# Altium PCB Mako DSP R1.2.PcbDoc (part 1 of 2)
Units mil, origin at the board's own origin, x right, y up, seen from the top; angles counter-clockwise.
Board outline 4500 x 2100 mil, 4 copper layers (Top Layer, GND, Power, Bottom Layer); 169 components, 129 nets, 625 pads, 177 vias.
Unrouted connection lines stored in the file: 86.
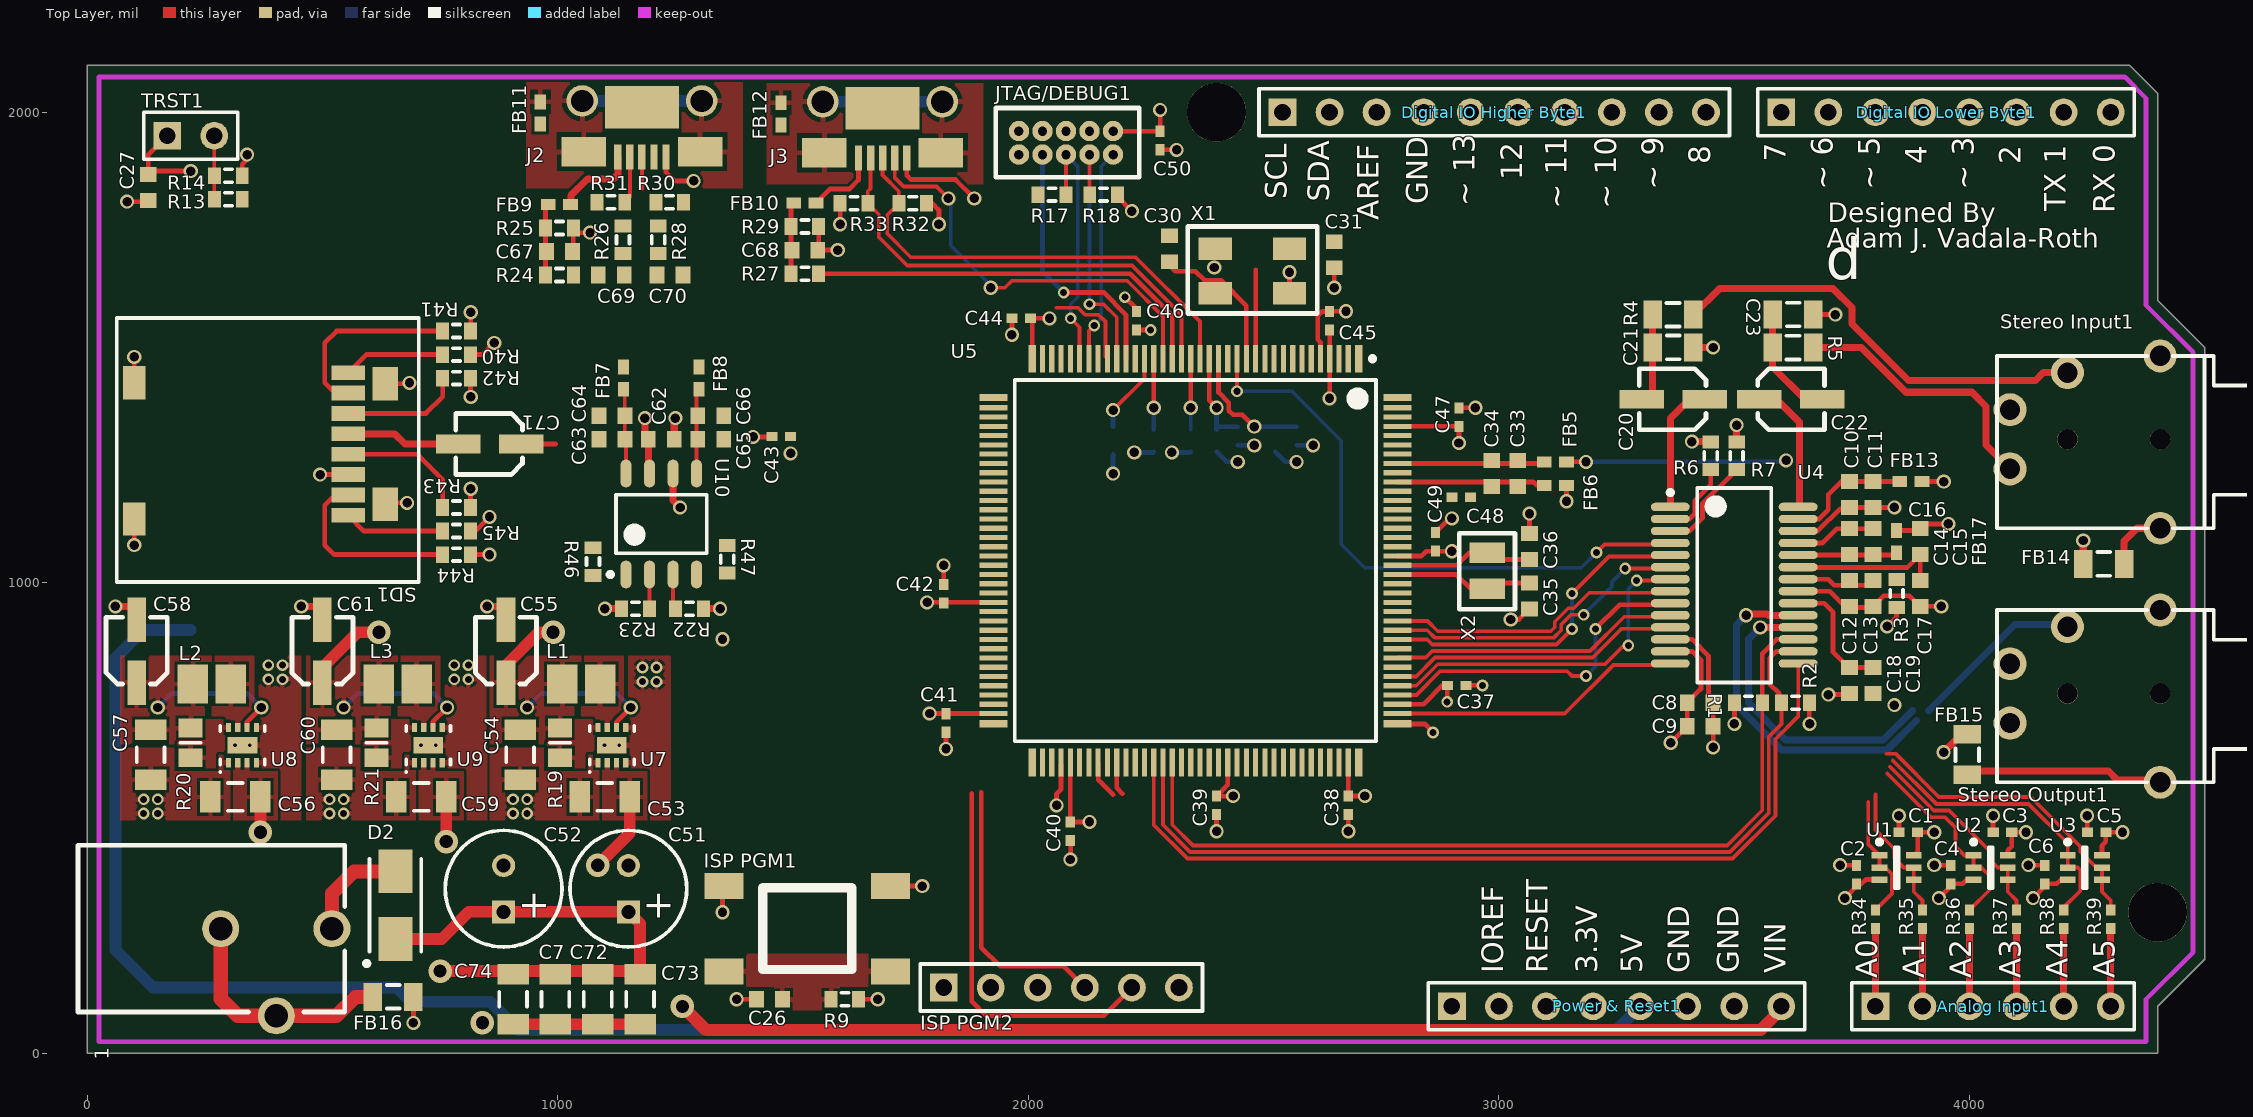
[diagram p0: Top Layer view]
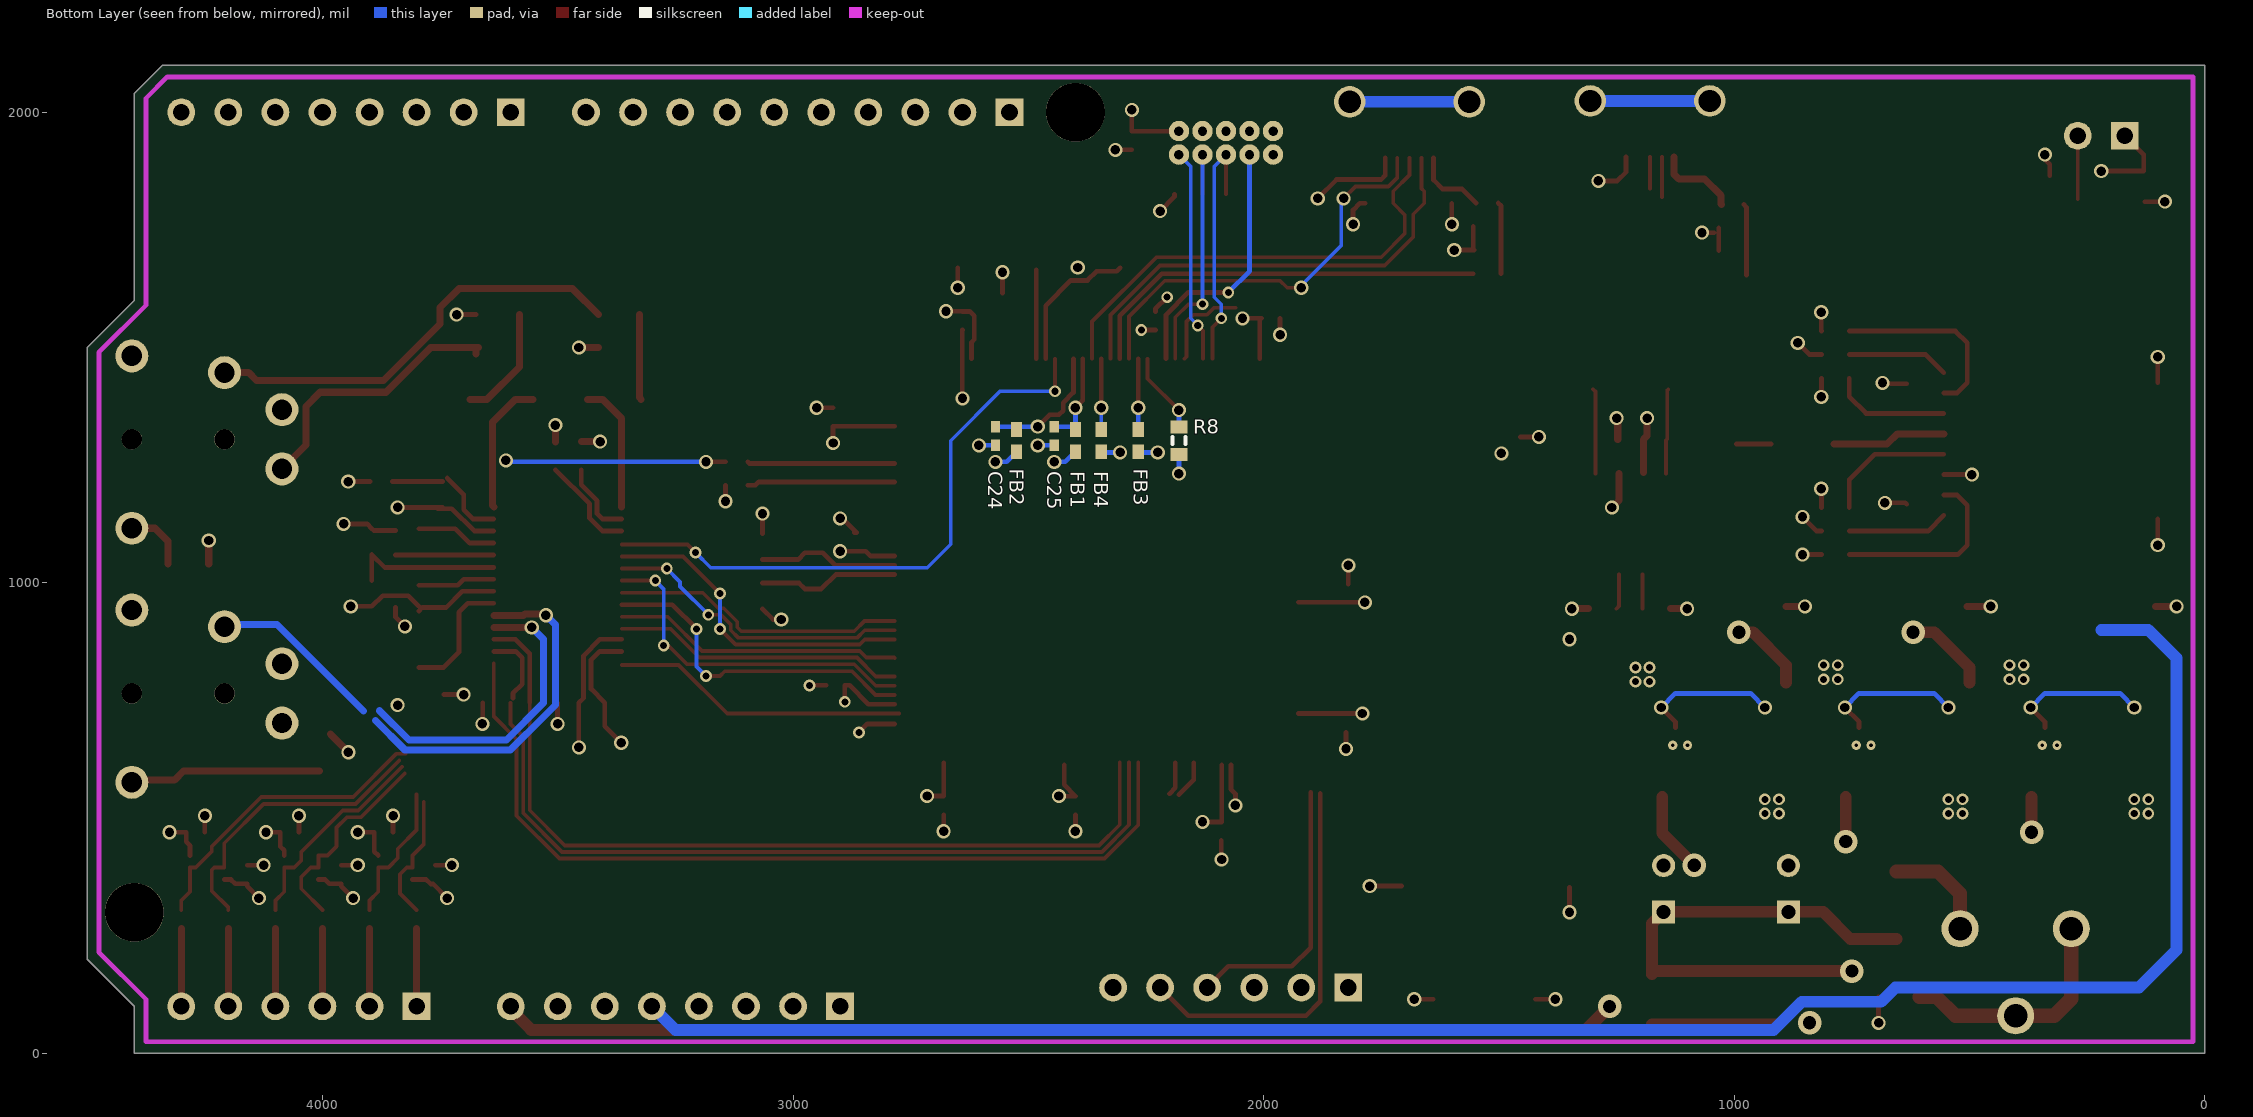
[diagram p1: Bottom Layer view, seen from below]
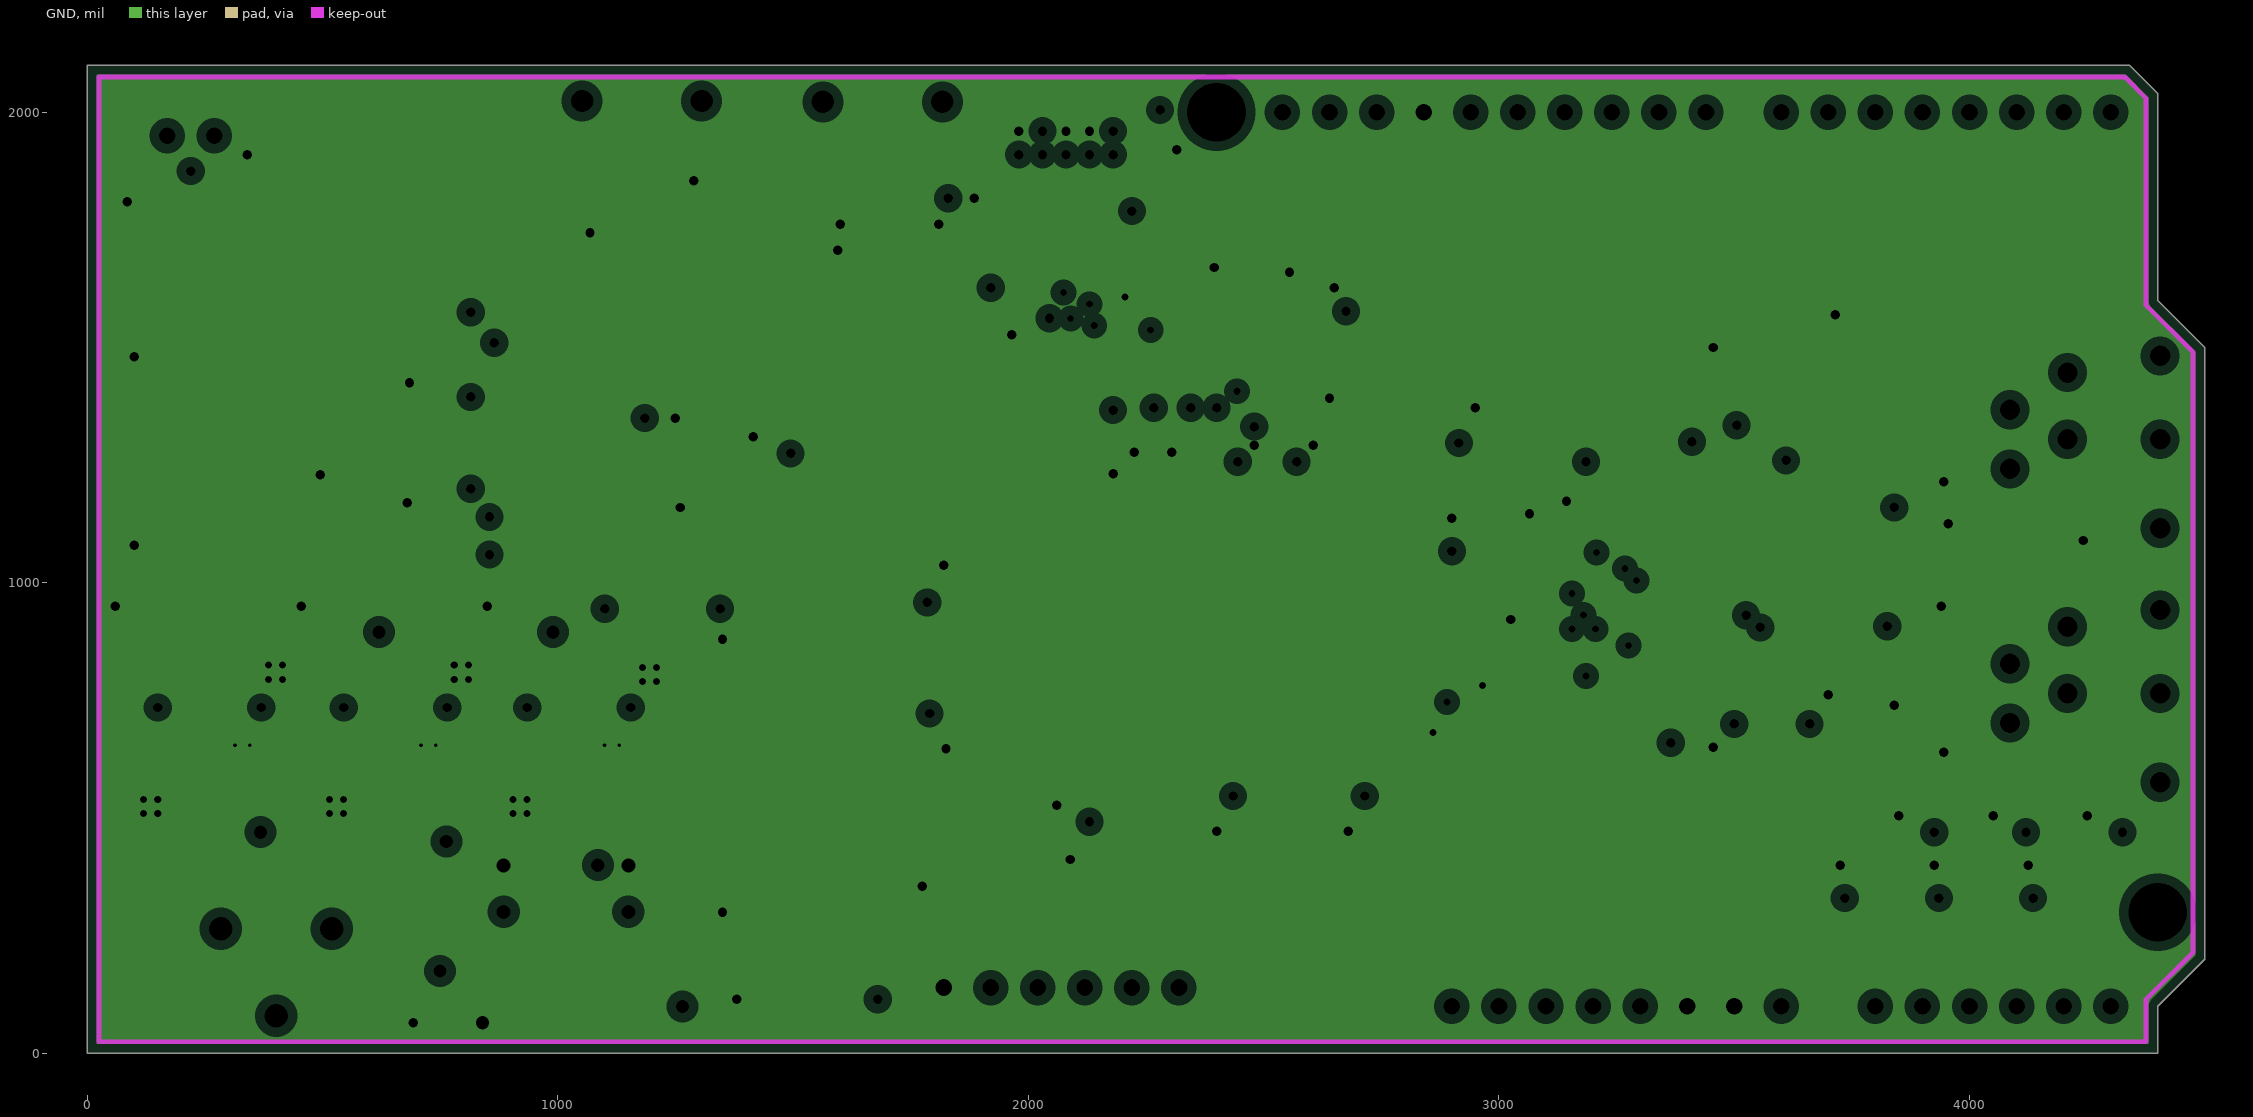
[diagram p2: GND, clearances drawn from the general rule]
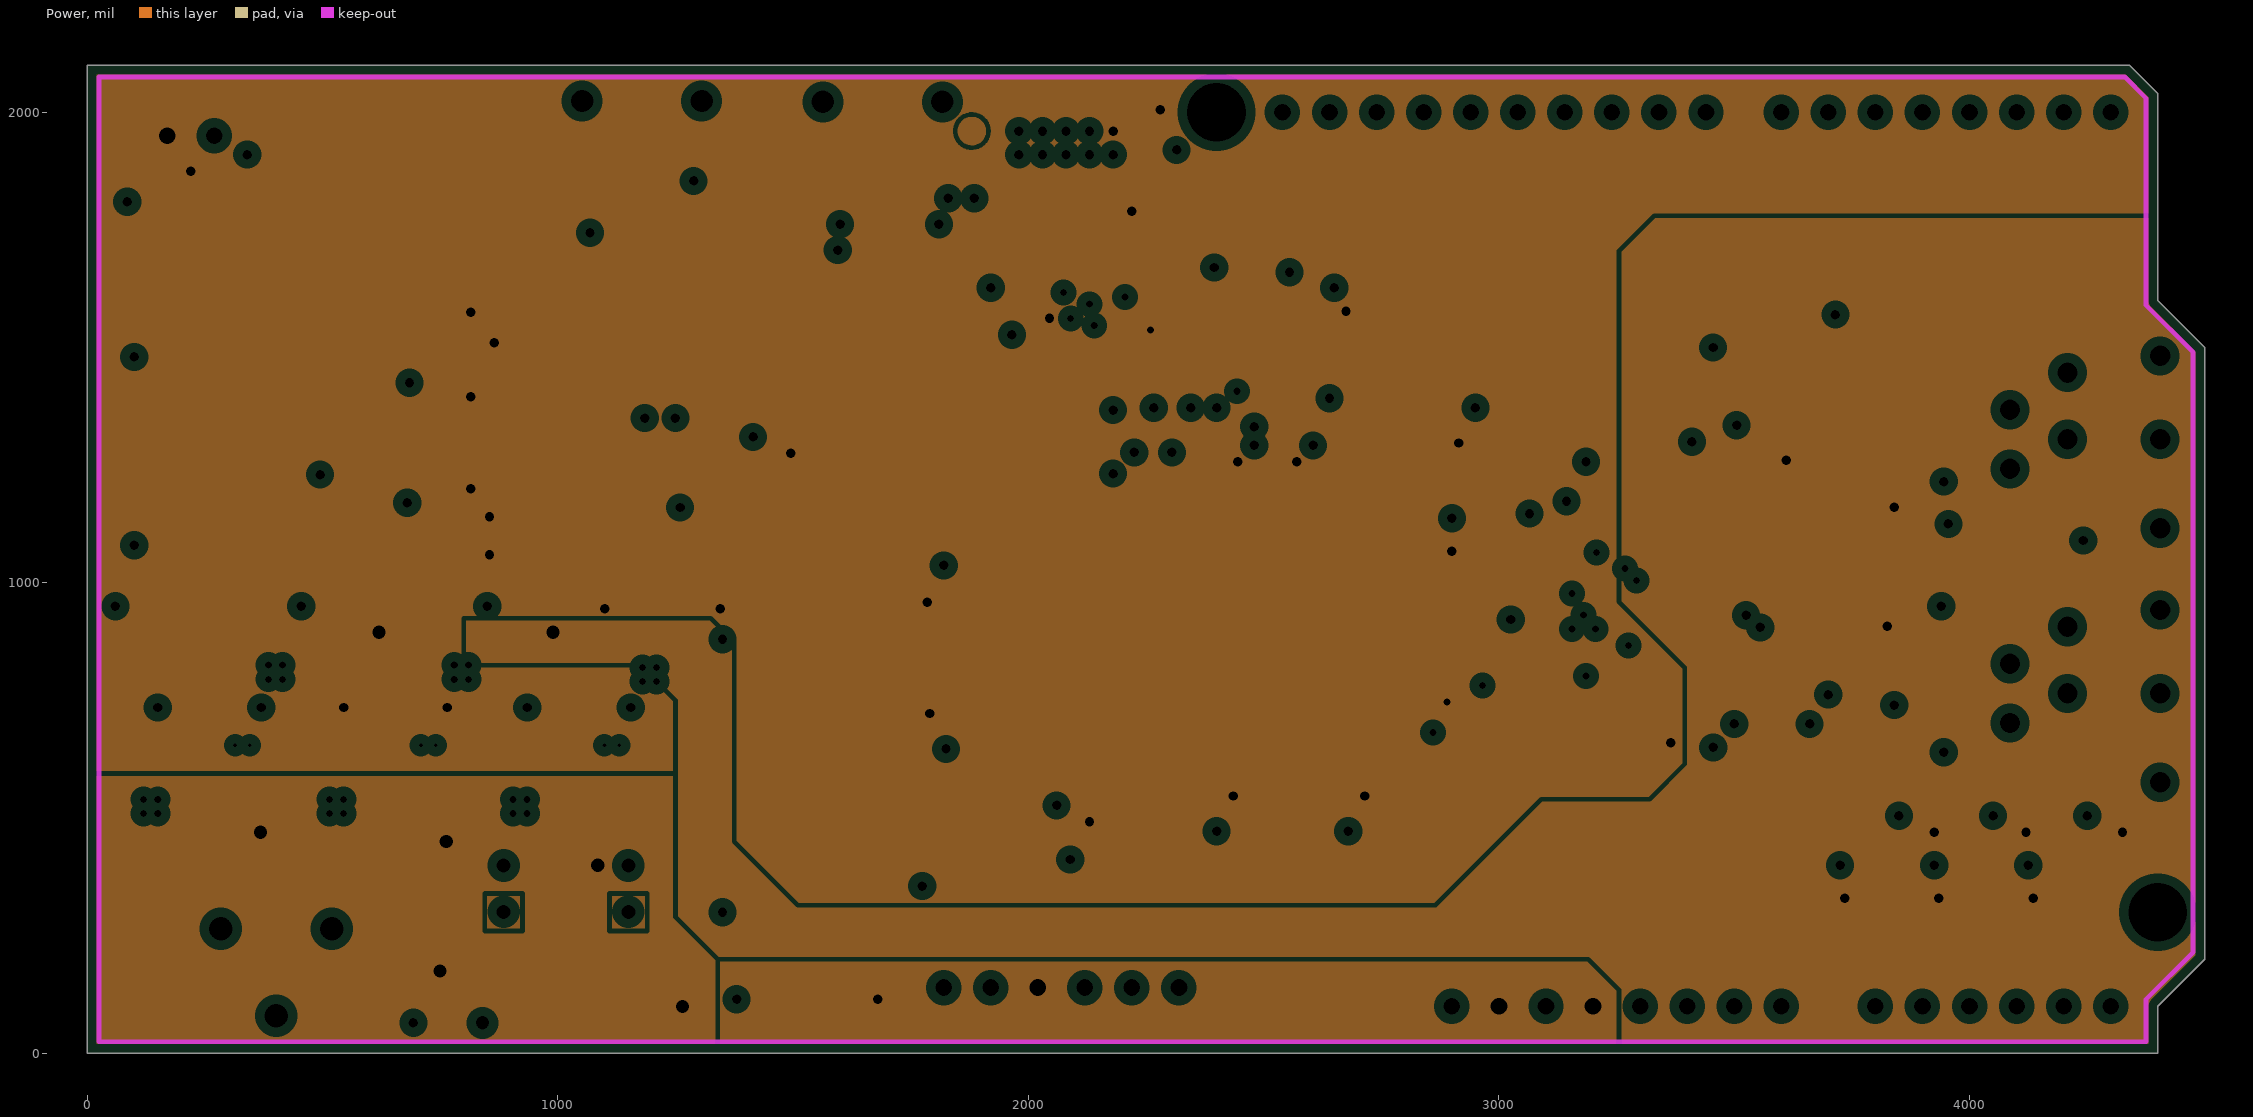
[diagram p3: Power, clearances drawn from the general rule]

## Layer stack, top to bottom
Top Layer: signal copper 1.4
Dielectric: core 12.6, FR-4, Dk 4.8
GND: plane copper 1.4, net GND
Dielectric: prepreg 12.6, FR-4, Dk 4.8
Power: plane copper 1.4, net (Multiple Nets)
Dielectric: core 12.6, FR-4, Dk 4.8
Bottom Layer: signal copper 1.4

## Board outline
0,0 0,2100 4340,2100 4400,2040 4400,1600 4500,1500 4500,200 4400,100 4400,0

## Design rules (kind name [scope] priority, off if disabled: settings)
Clearance [All] p1: gap=6
ComponentClearance [All] p1: gap=0 collisioncheckmode=3 verticalgap=10 showdistances=FALSE
DiffPairsRouting [All] p1: maxlimit=10 minlimit=10 mostfreqgap=10 maxuncoupledlength=500
FanoutControl Fanout_SOIC [(InComponent('U8') AND InComponent('U7'))] p3: bgadir=Out bgaviamode=Centered fanoutstyle=Staggered fanoutdirection=Alternating viagrid=1 // Fanout_SOIC (Default Rule)
FanoutControl Fanout_Small [All] p4: bgadir=Out bgaviamode=Centered fanoutstyle=Auto fanoutdirection=Alternating viagrid=1 // Fanout_Small (Default Rule)
HoleSize [All] p1: absolutevalues=TRUE maxlimit=120 minlimit=1 maxpercent=80.000 minpercent=20.000
MinimumSolderMaskSliver [All] p1 off: minsoldermaskwidth=10
PlaneClearance [All] p1: clearance=20
PlaneConnect [All] p1: planeconnectstyle=Direct reliefexpansion=20 reliefentries=4 reliefconductorwidth=10 reliefairgap=10
PolygonConnect [All] p1: connectstyle=Relief reliefconductorwidth=10 reliefentries=4 polygonreliefangle="90 Angle" airgapwidth=10
RoutingVias [All] p1: holewidth=15 width=25 viastyle="Through Hole" minholewidth=15 minwidth=25 maxholewidth=28 maxwidth=50
SilkToSilkClearance [All] p1 off: silktosilkclearance=10
SilkToSolderMaskClearance SilkscreenOverComponentPads [IsPad] p1 off: minsilkscreentomaskgap=10 clearancetoexposedcopper=TRUE
SolderMaskExpansion [All] p1: expansion=4
Width [All] p1: maxlimit=30 minlimit=6 preferedwidth=6 minimp=50.000000 maximp=50.000000 favimp=50.000000
18 further rules are at their usual default settings.

## Classes and differential pairs
component class "Mako DSP Power R1.1": 1 12VDC/VCCIN C7 C51 C52 C53 C54 C55 C56 C57 C58 C59 C60 C61 C72 C73 C74 D2 D? FB16 L1 L2 L3 L? R19 R20 R21 U7 U8 U9
component class "Mako DSP Arduio IO R1.1": "Analog Input1" "Analog Input?" C1 C2 C3 C4 C5 C6 "Digital IO Higher Byte1" "Digital IO Higher Byte?" "Digital IO Lower Byte1" "Digital IO Lower Byte?" "Power & Reset1" "Power & Reset?" R34 R35 R36 R37 R38 R39 SSP? U1 U2 U3
component class "Mako DSP Audio Codec R1.1": C8 C9 C10 C11 C12 C13 C14 C15 C16 C17 C18 C19 C20 C21 C22 C23 FB13 FB14 FB15 FB17 R1 R2 R3 R4 R5 R6 R7 "Stereo Input1" "Stereo Input?" "Stereo Output1" "Stereo Output?" U4
component class "Mako DSP Main R1.1": C24 C25 C26 C27 C28 C29 C30 C31 C32 C33 C34 C35 C36 C37 C38 C39 C40 C41 C42 C43 C44 C45 C46 C47 C48 C49 C50 C71 DBGEN1 FB1 FB2 FB3 FB4 FB5 FB6 "ISP PGM" "ISP PGM1" "ISP PGM2" JTAG/DEBUG1 R8 R9 R12 R13 R14 R15 R16 R17 R18 R40 R41 R42 R43 R44 R45 RESET RESET1 RTCALARM1 SD1 TRST1 U5 WAKEUP1 X1 X2
component class "Mako DSP USBR1.1": C62 C63 C64 C65 C66 C67 C68 C69 C70 FB7 FB8 FB9 FB10 FB11 FB12 J2 J3 R22 R23 R24 R25 R26 R27 R28 R29 R30 R31 R32 R33 R46 R47 U10
differential pair USB_1: +USB_1_P -USB_1_N
differential pair USB1: +USB1_P -USB1_N
differential pair USB0: +USB0_P -USB0_N

## Components (designator, comment, footprint, x,y, rotation, side; value= is the part's Value field where it differs from the comment)
1 "Center-positive 2.1 mm power jack" PJ-102AH 520,265 r90 top
"Analog Input1" "Arduino Leonardo Analog" "Arduino Leonardo Analog" 3800,100 r0 top locked
C1 "Cap Semi" 0402 3870,470 r0 top
C2 "Cap Semi" 0402 3760,380 r270 top
C3 "Cap Semi" 0402 4070,470 r0 top
C4 "Cap Semi" 0402 3960,380 r270 top
C5 "Cap Semi" 0402 4270,470 r0 top
C6 "Cap Semi" 0402 4160,380 r270 top
C7 "Cap Semi" C1206 995,115 r90 top
C8 "Cap Semi" 1608[0603] 3427.56,745.31 r180 top
C9 "Cap Semi" 1608[0603] 3427.56,695.31 r180 top
C10 "Cap Semi" 1608[0603] 3745,1187.56 r270 top
C11 "Cap Semi" 1608[0603] 3795,1187.56 r270 top
C12 "Cap Semi" 1608[0603] 3745,977.56 r90 top
C13 "Cap Semi" 1608[0603] 3795,977.56 r90 top
C14 "Cap Semi" 1608[0603] 3745,1087.56 r90 top
C15 "Cap Semi" 1608[0603] 3795,1087.56 r90 top
C16 "Cap Semi" 1608[0603] 3895,1087.56 r270 top
C17 "Cap Semi" 1608[0603] 3895,977.56 r90 top
C18 "Cap Semi" 1608[0603] 3745,792.56 r90 top
C19 "Cap Semi" 1608[0603] 3795,792.56 r90 top
C20 "Cap Semi" "Panasonic VS B" 3370,1390 r0 top
C21 "Cap Semi" "SM 0805 - gap trimmed" 3370,1500 r180 top
C22 "Cap Semi" "Panasonic VS B" 3620,1390 r180 top
C23 "Cap Semi" "SM 0805 - gap trimmed" 3625,1570 r180 top
C24 "Cap Semi" 0402 2570,1312.05 r90 bottom
C25 "Cap Semi" 0402 2445,1312.05 r90 bottom
C26 "Cap Semi" CAPC1608L 1450,115 r0 top
C27 "Cap Semi" CAPC1608L 130,1840 r90 top
C28 "Cap Semi" CAPC1608L 970,2590 r90 top
C29 "Cap Semi" CAPC1608L 3055,-505 r0 top
C30 "Cap Semi" 1608[0603] 2300,1710 r90 top
C31 "Cap Semi" 1608[0603] 2650,1697.05 r90 top
C32 "Cap Semi" CAPC1608L 5140,2480 r90 top
C33 "Cap Semi" 1608[0603] 3040,1232.05 r90 top
C34 "Cap Semi" 1608[0603] 2985,1232.05 r90 top
C35 "Cap Semi" 1608[0603] 3065,972.05 r90 top
C36 "Cap Semi" 1608[0603] 3065,1077.05 r270 top
C37 "Cap Semi" 0402 2910,782.05 r180 top
C38 "Cap Semi" 0402 2680,527.05 r90 top
C39 "Cap Semi" 0402 2400,527.05 r90 top
C40 "Cap Semi" 0402 2089.25,472.05 r90 top
C41 "Cap Semi" 0402 1825,702.05 r90 top
C42 "Cap Semi" 0402 1820,977.05 r270 top
C43 "Cap Semi" 0402 1475,1310.75 r0 top
C44 "Cap Semi" 0402 1985,1562.05 r0 top
C45 "Cap Semi" 0402 2640,1557.05 r90 top
C46 "Cap Semi" 0402 2230,1557.05 r270 top
C47 "Cap Semi" 0402 2915,1352.05 r270 top
C48 "Cap Semi" 0402 2920,1182.05 r180 top
C49 "Cap Semi" 0402 2865,1087.05 r270 top
C50 "Cap Semi" 0402 2280,1940 r90 top
C51 "Cap Pol1" CAPPR2.5-6.3x5 1150,350 r90 top
C52 "Cap Pol1" CAPPR2.5-6.3x5 885,350 r90 top
C53 "Cap Semi" C1206 1100,545 r0 top
C54 "Cap Semi" C1206 920,635 r90 top
C55 "Cap Semi" "Panasonic VS B" 890,855 r270 top
C56 "Cap Semi" C1206 315,545 r0 top
C57 "Cap Semi" C1206 135,635 r90 top
C58 "Cap Semi" "Panasonic VS B" 105,855 r270 top
C59 "Cap Semi" C1206 710,545 r0 top
C60 "Cap Semi" C1206 530,635 r90 top
C61 "Cap Semi" "Panasonic VS B" 500,855 r270 top
C62 "Cap Semi" 1608[0603] 1220,1305 r180 top
C63 "Cap Semi" 1608[0603] 1115,1305 r0 top
C64 "Cap Semi" 1608[0603] 1115,1355 r0 top
C65 "Cap Semi" 1608[0603] 1325,1305 r180 top
C66 "Cap Semi" 1608[0603] 1325,1355 r180 top
C67 "Cap Semi" 1608[0603] 1003.56,1704.04 r180 top
C68 "Cap Semi" 1608[0603] 1525,1707.05 r180 top
C69 "Cap Semi" 1608[0603] 1113.56,1654.04 r0 top
C70 "Cap Semi" 1608[0603] 1238.56,1654.04 r180 top
C71 "Cap Semi" "Panasonic VS B" 855,1295 r0 top
C72 "Cap Semi" C1206 1085,115 r90 top
C73 "Cap Semi" C1206 1175,115 r90 top
C74 "Cap Semi" C1206 905,115 r90 top
D2 "PMEG4050EP" PMEG4050EP 655,315 r90 top
DBGEN1 "Header 2" HDR1X2 1010,2700 r0 top
"Digital IO Higher Byte1" "Arduino Leonardo High Byte" "Arduino Leonardo High Byte" 2540,2000 r0 top
"Digital IO Lower Byte1" "Arduino Leonardo Low Byte" "Arduino Leonardo Low Byte" 3600,2000 r0 top locked
FB1 "BLM15HG601SN1D" BLM18PG121SN1D 2400,1302.05 r90 bottom
FB2 "BLM15HG601SN1D" BLM18PG121SN1D 2525,1302.05 r90 bottom
FB3 "BLM15HG601SN1D" BLM18PG121SN1D 2266.42,1302.05 r270 bottom
FB4 "BLM15HG601SN1D" BLM18PG121SN1D 2345,1302.05 r270 bottom
FB5 "BLM15HG601SN1D" BLM18PG121SN1D 3120,1257.05 r180 top
FB6 "BLM15HG601SN1D" BLM18PG121SN1D 3120,1207.05 r180 top
FB7 "BLM15HG601SN1D" BLM18PG121SN1D 1140,1435 r90 top
FB8 "BLM15HG601SN1D" BLM18PG121SN1D 1300,1435 r90 top
FB9 "BLM15HG601SN1D" BLM18PG121SN1D 1003.56,1804.04 r0 top
FB10 "BLM15HG601SN1D" BLM18PG121SN1D 1525,1807.05 r0 top
FB11 "BLM15HG601SN1D" BLM18PG121SN1D 962.83,1998.46 r270 top
FB12 "BLM15HG601SN1D" BLM18PG121SN1D 1474.28,1996.47 r270 top
FB13 "BLM15HG601SN1D" BLM18PG121SN1D 3875.16,1215.16 r0 top
FB14 "Ferrite" "SM 0805 - gap trimmed" 4285,1040 r180 top
FB15 "Ferrite" "SM 0805 - gap trimmed" 3995,635 r90 top
FB16 "Ferrite" "SM 0805 - gap trimmed" 650,120 r180 top
FB17 "BLM15HG601SN1D" BLM18PG121SN1D 3845,1087.56 r90 top
"ISP PGM1" "Tactile Switch" TL3301 1530,265 r90 top
"ISP PGM2" "Header 6" HDR1X6 1820,140 r0 top
J2 "DX4R005J91R5100" "Micro USB Circular Holes Only" 1177.83,2063.46 r180 top
J3 "DX4R005J91R5100" "Micro USB Circular Holes Only" 1689.28,2061.47 r180 top
JTAG/DEBUG1 "S9015E-05-ND" S9015E-05-ND 1980,1960 r0 top
L1 "Inductor" VLS252012T-2R2M1R3 1050,785 r180 top
L2 "Inductor" VLS252012T-2R2M1R3 265,785 r180 top
L3 "Inductor" VLS252012T-2R2M1R3 660,785 r180 top
"Power & Reset1" "Arduino Leonardo Power" "Arduino Leonardo Power" 2900,100 r0 top locked
R1 "Res3" J1-0603 3530.16,745.16 r180 top
R2 "Res3" J1-0603 3630.16,745.16 r0 top
R3 "Res3" J1-0603 3845,977.56 r270 top
R4 "Res3" "SM 0805 - gap trimmed" 3370,1570 r0 top
R5 "Res3" "SM 0805 - gap trimmed" 3625,1500 r0 top
R6 "Res3" J1-0603 3450,1270 r270 top
R7 "Res3" J1-0603 3505,1270 r270 top
R8 "Res3" J1-0603 2180,1302.05 r90 bottom
R9 "Res3" J1-0603 1610,115 r0 top
R12 "Res3" J1-0603 3215,-505 r0 top
R13 "Res3" J1-0603 300,1815 r180 top
R14 "Res3" J1-0603 300,1865 r180 top
R15 "Res3" J1-0603 1140,2565 r180 top
R16 "Res3" J1-0603 1140,2615 r180 top
R17 "Res3" J1-0603 2050,1825 r180 top
R18 "Res3" J1-0603 2160,1825 r0 top
R19 "Res3" RESC2012L 1005,660 r90 top
R20 "Res3" RESC2012L 220,660 r90 top
R21 "Res3" RESC2012L 615,660 r90 top
R22 "Res3" J1-0603 1280,945 r180 top
R23 "Res3" J1-0603 1165,945 r0 top
R24 "Res3" J1-0603 1003.56,1654.04 r0 top
R25 "Res3" J1-0603 1003.56,1754.04 r0 top
R26 "Res3" J1-0603 1138.56,1729.04 r90 top
R27 "Res3" J1-0603 1525,1657.05 r0 top
R28 "Res3" J1-0603 1213.56,1729.04 r90 top
R29 "Res3" J1-0603 1525,1757.05 r0 top
R30 "Res3" J1-0603 1237.83,1808.46 r0 top
R31 "Res3" J1-0603 1112.83,1808.46 r180 top
R32 "Res3" J1-0603 1754.28,1806.47 r0 top
R33 "Res3" J1-0603 1629.28,1806.47 r180 top
R34 "Res3" "0402 - duplicate" 3800,285 r90 top
R35 "Res3" "0402 - duplicate" 3900,285 r90 top
R36 "Res3" "0402 - duplicate" 4000,285 r90 top
R37 "Res3" "0402 - duplicate" 4100,285 r90 top
R38 "Res3" "0402 - duplicate" 4200,285 r90 top
R39 "Res3" "0402 - duplicate" 4300,285 r90 top
R40 "Res3" J1-0603 785,1485 r180 top
R41 "Res3" J1-0603 785,1535 r180 top
R42 "Res3" J1-0603 785,1435 r180 top
R43 "Res3" J1-0603 785,1160 r180 top
R44 "Res3" J1-0603 785,1060 r180 top
R45 "Res3" J1-0603 785,1110 r180 top
R46 "Res3" J1-0603 1075,1045 r90 top
R47 "Res3" J1-0603 1360,1050 r270 top
RESET1 "Tactile Switch" TL3301 3135,-355 r90 top
RTCALARM1 "Socket" PIN1 2020,5600 r90 top
SD1 "JAE SJ107021" "JAE SJ107021" 100,1295 r180 top
"Stereo Input1" "CUI 43515TS" "CUI SJ-43515TS" 4405,1305 r180 top
"Stereo Output1" "CUI 43515TS" "CUI SJ-43515TS" 4405,765 r180 top
TRST1 "Header 2" HDR1X2 170,1950 r0 top
U1 "BAV70S SOT-363" BAV70S_SOT363 3845,395 r0 top
U2 "BAV70S SOT-363" BAV70S_SOT363 4045,395 r0 top
U3 "BAV70S SOT-363" BAV70S_SOT363 4245,395 r0 top
U4 "WM8778" WM8778 3500,995 r0 top
U5 "LPC4330FBD144" SOT486-1_V 2355,1047.05 r270 top
U7 "TPS62162SOP" DSG8-1600X900TP 1115,655 r90 top
U8 "TPS62162SOP" DSG8-1600X900TP 330,655 r90 top
U9 "TPS62162SOP" DSG8-1600X900TP 725,655 r90 top
U10 "LM3526-H" LM3526 1220,1125 r90 top
WAKEUP1 "Socket" PIN1 2360,5615 r90 top
X1 "ABM3B-12.000MHZ-B2-T" ABM3B-12.000MHZ-B2-T 2555,1710 r180 top
X2 "ABS07-32.768KHZ-T" ABS07-32.768KHZ-T 2975,987.05 r90 top

## Footprints (in the part's own frame and the unit in brackets; to place one, negate y for a bottom-side part, rotate by r counter-clockwise, add the part's x,y. Pads: shape width x height; smd on the part's side, far side on the other; paste and mask are expansions set on the pad)
0402 [mm] "Chip Capacitor, Body 1.0x0.5mm, IPC High Density"
  rect 0.6x0.5 smd: 1(-0.5,0) 2(0.5,0)
  body extent -0.55,-0.3 0.55,0.3, height 1.3
"0402 - duplicate" [mm] "Chip Capacitor, Body 1.0x0.5mm, IPC High Density"
  rect 0.6x0.5 smd: 1(-0.5,0) 2(0.5,0)
  body extent -0.55,-0.3 0.55,0.3, height 1.3
1608[0603] [mm] "Chip Capacitor, Body 1.6x0.8mm, IPC High Density"
  rect 0.8x0.9 smd: 1(-0.7,0) 2(0.7,0)
  body extent -0.87,-0.48 0.87,0.48, height 1.3
ABM3B-12.000MHZ-B2-T [mm] "ABM3B-12.000MHZ-B2-T 12MHZ Crystam Oscillator"
  rect 1.8x1.2 smd: 1(0,0) 2(4,0) 3(4,2.4) 4(0,2.4)
  silkscreen extent -1.5,-1.2 5.5,3.5
ABS07-32.768KHZ-T [mm] "ABS07-32.768KHZ-T Crystal Oscillator"
  rect 1.1x1.9 smd: 1(0,0) 2(1.95,0)
  silkscreen extent -1.1,-1.5 3,1.5
"Arduino Leonardo Analog" [mm] "Connector; Header; 6 Position"
  rect 1.5x1.5 hole 0.9: 1(0,0)
  round 1.5 hole 0.9: 2(2.54,0) 3(5.08,0) 4(7.62,0) 5(10.16,0) 6(12.7,0)
  silkscreen extent -1.27,-1.27 13.97,1.27
"Arduino Leonardo High Byte" [mm]
  rect 1.5x1.5 hole 0.9: 1(0,0)
  round 1.5 hole 0.9: 2(2.54,0) 3(5.08,0) 4(7.62,0) 5(10.16,0) 6(12.7,0) 7(15.24,0) 8(17.78,0) 9(20.32,0) 10(22.86,0)
  silkscreen extent -1.27,-1.27 24.13,1.27
"Arduino Leonardo Low Byte" [mm] "Connector; Header; 8 Position"
  rect 1.5x1.5 hole 0.9: 1(0,0)
  round 1.5 hole 0.9: 2(2.54,0) 3(5.08,0) 4(7.62,0) 5(10.16,0) 6(12.7,0) 7(15.24,0) 8(17.78,0)
  silkscreen extent -1.27,-1.27 19.05,1.27
"Arduino Leonardo Power" [mm] "Connector; Header; 8 Position"
  rect 1.5x1.5 hole 0.9: 1(0,0)
  round 1.5 hole 0.9: 2(2.54,0) 3(5.08,0) 4(7.62,0) 5(10.16,0) 6(12.7,0) 7(15.24,0) 8(17.78,0)
  silkscreen extent -1.27,-1.27 19.05,1.27
BAV70S_SOT363 [mm] "SOT23, 6-Leads, Body 2.2x2.2mm (max), Pitch 0.65mm, IPC Medium Density"
  rect 0.85x0.35 smd: 1(-0.925,0.65) 2(-0.925,0) 3(-0.925,-0.65) 4(0.925,-0.65) 5(0.925,0) 6(0.925,0.65)
  silkscreen extent -1.05,-1.1 0.1,1.5, body extent -0.67,-1.1 0.67,1.1, height 1.1
BLM18PG121SN1D [mm] "Chip Inductor, 2-Leads, Body 1.0x0.5mm, IPC Medium Density"
  rect 0.8x0.6 smd: 1(-0.6,0) 2(0.6,0)
  body extent -0.52,-0.28 0.53,0.27, height 0.6
C1206 [mm] "Chip Capacitor, Body 3.2x1.6mm, IPC High Density"
  rect 1.1x1.7 smd: 1(-1.35,0) 2(1.35,0)
  silkscreen extent -0.4,-0.75 0.4,0.75, body extent -1.7,-0.9 1.7,0.9, height 1.3
CAPC1608L [mm] "Chip Capacitor, Body 1.6x0.8mm, IPC High Density"
  rect 0.8x0.9 smd: 1(-0.7,0) 2(0.7,0)
  body extent -0.87,-0.48 0.87,0.48, height 0.85
CAPPR2.5-6.3x5 [mm] "Capacitor, Electrolytic, Radial; Body 6.3 x 5 mm (Dia.xH typ); Pin Spacing 2.5 mm (typ)"
  rect 1.25x1.25 hole 0.75: 1(-1.25,0)
  round 1.25 hole 0.75: 2(1.25,0)
  silkscreen extent -3.15,-3.15 3.15,3.15
"CUI SJ-43515TS" [mm]
  round 1.778 hole 1.1: 1(8.1,1.6) 3(8.1,-1.6) 4(5,-3.6) 5(0,4.8) 6(0,-4.5)
  round 1.1 hole 1.1: ""(0,0) ""(5,0)
  silkscreen extent -5.4,-4.5 8.8,4.8
DSG8-1600X900TP [mm] "SON, 8-Leads, Body 2x2mm, Pitch 0.5mm, Thermal Pad 1.6x0.9mm, TI Recommended"
  rect 0.5x0.28 smd paste-0.14 mask+0.07: 1(-0.95,0.75) 2(-0.95,0.25) 3(-0.95,-0.25) 4(-0.95,-0.75) 5(0.95,-0.75) 6(0.95,-0.25) 7(0.95,0.25) 8(0.95,0.75)
  rect 0.9x1.6 smd paste-0.45 mask+0.07: 9(0,0)
  silkscreen extent -1.5,-1.2 1.05,1.25, body extent -1.05,-1.05 1.05,1.05, height 0.8
HDR1X2 [mm] "Connector; Header; 2 Position"
  rect 1.5x1.5 hole 0.9: 1(0,0)
  round 1.5 hole 0.9: 2(2.54,0)
  silkscreen extent -1.27,-1.27 3.81,1.27
HDR1X6 [mm] "Connector; Header; 6 Position"
  rect 1.5x1.5 hole 0.9: 1(0,0)
  round 1.5 hole 0.9: 2(2.54,0) 3(5.08,0) 4(7.62,0) 5(10.16,0) 6(12.7,0)
  silkscreen extent -1.27,-1.27 13.97,1.27
J1-0603 [mm] "Chip Resistor, Body 1.6x0.8mm, IPC High Density"
  rect 0.7x0.9 smd: 1(-0.75,0) 2(0.75,0)
  silkscreen extent -0.2,-0.35 0.2,0.35, body extent -0.85,-0.48 0.85,0.48, height 0.9
"JAE SJ107021" [mm] "MicroSD card socket"
  rect 1.8x0.8 smd: 1(-11.55,-3.85) 2(-11.55,-2.75) 3(-11.55,-1.65) 4(-11.55,-0.55) 5(-11.55,0.55) 6(-11.55,1.65) 7(-11.55,2.75) 8(-11.55,3.85)
  rect 1.2x1.8 smd: 9(0,-3.3) 10(0,4.05)
  rect 1.4x1.8 smd: 11(-13.55,-3.25) 12(-13.55,3.25)
  silkscreen extent -15.35,-6.8 0.95,7.45, body extent -15.25,-6.75 1,7.5, height 2
LM3526 [mm] "TSOP, 8-Leads, Body 4.9x3.9mm (max), Pitch 1.27mm, IPC Medium Density"
  oval 1.5x0.6 smd: 1(-2.725,1.905) 2(-2.725,0.635) 3(-2.725,-0.635) 4(-2.725,-1.905) 5(2.725,-1.905) 6(2.725,-0.635) 7(2.725,0.635) 8(2.725,1.905)
  silkscreen extent -2.85,-2.45 1.57,2.88, body extent -1.95,-2.45 1.95,2.45, height 1.45
"Micro USB Circular Holes Only" [mm]
  rect 0.4x1.35 smd: 1(1.275,4.025) 2(0.625,4.025) 3(-0.025,4.025) 4(-0.675,4.025) 5(-1.325,4.025)
  rect 2.4x1.6 smd: 6(3.125,3.75) 9(-3.175,3.75)
  round 1.7 hole 1.2: 7(3.2,1) 8(-3.25,1)
  rect 4x2.3 smd: GND(-0.025,1.35)
"Panasonic VS B" [mm]
  rect 2.4x1 smd: 1(1.7,0) 2(-1.7,0)
  silkscreen extent -1.83,-1.65 1.78,1.65
PIN1 [mm] "Connector; Plug"
  rect 1.5x1.5 hole 0.9: 1(0,0)
  silkscreen extent -1.4,-1.4 1.4,2.17
PJ-102AH [mm] "Center positive 2.1 mm power jack"
  round 2 hole 1.27: 1(0,0) 2(0,6) 3(-4.7,3)
  silkscreen extent -4.5,-0.7 4.5,13.7, body extent -5.8,-0.7 4.5,13.7, height 11
PMEG4050EP [mm] "PMEG4050EP NXP SMD Schottky Diode"
  rect 2.35x1.85 smd: 1(-1.825,0) 2(1.825,0)
  silkscreen extent -3.27,-1.4 2.5,1.67, body extent -2.5,-1.35 2.5,1.35, height 1.1
RESC2012L [mm] "Chip Resistor, Body 2.0x1.3mm, IPC High Density"
  rect 1x1.3 smd: 1(-0.8,0) 2(0.8,0)
  silkscreen extent 0,-0.55 0,0.55, body extent -1.07,-0.7 1.07,0.7, height 0.65
S9015E-05-ND [mm] "10 Pin Cortex JTAG Debug Header"
  round 1.1 hole 0.508: 1(5.08,0) 2(5.08,-1.27) 3(3.81,0) 4(3.81,-1.27) 5(2.54,0) 6(2.54,-1.27) 7(1.27,0) 8(1.27,-1.27) 9(0,0) 10(0,-1.27)
  round 0.5 on Top Overlay: 1(7,0.8)
  silkscreen extent -1.25,-2.5 6.5,1.25
"SM 0805 - gap trimmed" [mm]
  rect 1x1.5 smd: 1(-1.1,0) 2(1.1,0)
  silkscreen extent -0.36,-0.64 0.35,0.63
SOT486-1_V [mm] "Thin QFP, 144-Leads, Body 20x20mm, Pitch 0.5mm, NXP Recommended"
  rect 1.5x0.4 smd: 1(-10.9,8.81) 36(-10.9,-8.81) 73(10.9,-8.81) 108(10.9,8.81)
  rect 1.5x0.28 smd: 2(-10.9,8.25) 3(-10.9,7.75) 4(-10.9,7.25) 5(-10.9,6.75) 6(-10.9,6.25) 7(-10.9,5.75) 8(-10.9,5.25) 9(-10.9,4.75) 10(-10.9,4.25) 11(-10.9,3.75) 12(-10.9,3.25) 13(-10.9,2.75) 14(-10.9,2.25) 15(-10.9,1.75) 16(-10.9,1.25) 17(-10.9,0.75) 18(-10.9,0.25) 19(-10.9,-0.25) 20(-10.9,-0.75) 21(-10.9,-1.25) 22(-10.9,-1.75) 23(-10.9,-2.25) 24(-10.9,-2.75) 25(-10.9,-3.25) 26(-10.9,-3.75) 27(-10.9,-4.25) 28(-10.9,-4.75) 29(-10.9,-5.25) 30(-10.9,-5.75) 31(-10.9,-6.25) 32(-10.9,-6.75) 33(-10.9,-7.25) 34(-10.9,-7.75) 35(-10.9,-8.25) 74(10.9,-8.25) 75(10.9,-7.75) 76(10.9,-7.25) 77(10.9,-6.75) 78(10.9,-6.25) 79(10.9,-5.75) 80(10.9,-5.25) 81(10.9,-4.75) 82(10.9,-4.25) 83(10.9,-3.75) 84(10.9,-3.25) 85(10.9,-2.75) 86(10.9,-2.25) 87(10.9,-1.75) 88(10.9,-1.25) 89(10.9,-0.75) 90(10.9,-0.25) 91(10.9,0.25) 92(10.9,0.75) 93(10.9,1.25) 94(10.9,1.75) 95(10.9,2.25) 96(10.9,2.75) 97(10.9,3.25) 98(10.9,3.75) 99(10.9,4.25) 100(10.9,4.75) 101(10.9,5.25) 102(10.9,5.75) 103(10.9,6.25) 104(10.9,6.75) 105(10.9,7.25) 106(10.9,7.75) 107(10.9,8.25)
  rect 0.4x1.5 smd: 37(-8.81,-10.9) 72(8.81,-10.9) 109(8.81,10.9) 144(-8.81,10.9)
  rect 0.28x1.5 smd: 38(-8.25,-10.9) 39(-7.75,-10.9) 40(-7.25,-10.9) 41(-6.75,-10.9) 42(-6.25,-10.9) 43(-5.75,-10.9) 44(-5.25,-10.9) 45(-4.75,-10.9) 46(-4.25,-10.9) 47(-3.75,-10.9) 48(-3.25,-10.9) 49(-2.75,-10.9) 50(-2.25,-10.9) 51(-1.75,-10.9) 52(-1.25,-10.9) 53(-0.75,-10.9) 54(-0.25,-10.9) 55(0.25,-10.9) 56(0.75,-10.9) 57(1.25,-10.9) 58(1.75,-10.9) 59(2.25,-10.9) 60(2.75,-10.9) 61(3.25,-10.9) 62(3.75,-10.9) 63(4.25,-10.9) 64(4.75,-10.9) 65(5.25,-10.9) 66(5.75,-10.9) 67(6.25,-10.9) 68(6.75,-10.9) 69(7.25,-10.9) 70(7.75,-10.9) 71(8.25,-10.9) 110(8.25,10.9) 111(7.75,10.9) 112(7.25,10.9) 113(6.75,10.9) 114(6.25,10.9) 115(5.75,10.9) 116(5.25,10.9) 117(4.75,10.9) 118(4.25,10.9) 119(3.75,10.9) 120(3.25,10.9) 121(2.75,10.9) 122(2.25,10.9) 123(1.75,10.9) 124(1.25,10.9) 125(0.75,10.9) 126(0.25,10.9) 127(-0.25,10.9) 128(-0.75,10.9) 129(-1.25,10.9) 130(-1.75,10.9) 131(-2.25,10.9) 132(-2.75,10.9) 133(-3.25,10.9) 134(-3.75,10.9) 135(-4.25,10.9) 136(-4.75,10.9) 137(-5.25,10.9) 138(-5.75,10.9) 139(-6.25,10.9) 140(-6.75,10.9) 141(-7.25,10.9) 142(-7.75,10.9) 143(-8.25,10.9)
  silkscreen extent -11.02,-9.75 9.75,9.75, body extent -10,-10 10,10, height 1.6
TL3301 [mm]
  rect 1.4x2.1 smd: 1(-2.3,4.5) 1(-2.3,-4.5) 2(2.3,4.5) 2(2.3,-4.5)
  silkscreen extent -2.2,-2.4 2.2,2.4
VLS252012T-2R2M1R3 [mm] "Precision Wire Wound Inductor, 2-Leads, Body 2.5x2.0mm, IPC Medium Density"
  rect 1.65x2.1 smd: 1(-1.025,0) 2(1.025,0)
  body extent -1.3,-1.05 1.3,1.05, height 1.2
WM8778 [mm] "SOP, 28 Pin Wolfson Audio WM8778 Audio Codec"
  oval 2.1x0.45 smd: 1(-3.45,4.225) 2(-3.45,3.575) 3(-3.45,2.925) 4(-3.45,2.275) 5(-3.45,1.625) 6(-3.45,0.975) 7(-3.45,0.325) 8(-3.45,-0.325) 9(-3.45,-0.975) 10(-3.45,-1.625) 11(-3.45,-2.275) 12(-3.45,-2.925) 13(-3.45,-3.575) 14(-3.45,-4.225) 15(3.45,-4.225) 16(3.45,-3.575) 17(3.45,-2.925) 18(3.45,-2.275) 19(3.45,-1.625) 20(3.45,-0.975) 21(3.45,-0.325) 22(3.45,0.325) 23(3.45,0.975) 24(3.45,1.625) 25(3.45,2.275) 26(3.45,2.925) 27(3.45,3.575) 28(3.45,4.225)
  silkscreen extent -3.57,-5.25 2,5.25, body extent -2.8,-5.25 2.8,5.25, height 2

## Part data
1: library part PWR2.5, "Power jack"
C1 C2 C3 C4 C5 C6 C7 C8 C9 C10 C11 C12 C13 C14 C15 C16 C17 C18 C19 C20 C21 C22 C23 C24 C25 C26 C27 C28 C29 C30 C31 C32 C33 C34 C35 C36 C37 C38 C39 C40 C41 C42 C43 C44 C45 C46 C47 C48 C49 C50 C53 C54 C55 C56 C57 C58 C59 C60 C61 C62 C63 C64 C65 C66 C67 C68 C69 C70 C71 C72 C73 C74: "Capacitor (Semiconductor SIM Model)"
C51 C52: "Polarized Capacitor (Radial)"
D2: library part Diode, "Default Diode"
DBGEN1 TRST1: "Header, 2-Pin"
FB14 FB15 FB16: library part Inductor, "Inductor"
"ISP PGM2": "Header, 6-Pin"
J2 J3: library part "Micro USB", "Micro USB Jack B"
R1 R2 R3 R4 R5 R6 R7 R8 R9 R12 R13 R14 R15 R16 R17 R18 R19 R20 R21 R22 R23 R24 R25 R26 R27 R28 R29 R30 R31 R32 R33 R34 R35 R36 R37 R38 R39 R40 R41 R42 R43 R44 R45 R46 R47: "Resistor"
SD1: library part "JAE SJ107021 microSD Card Socket"
U5: "32-bit ARM Cortex-M4 MCU, 264 kB SRAM, 2 HS USB with on-chip PHY, Ethernet, CAN, AES, SPIFI, SGPIO, SCT, 144-Pin LQFP"
U10: library part LM3526
X2: "ABS07-32.768KHZ-T RTC Crystal Oscillator"

## Free pads (board coordinates)
  round 125.1 hole 125.1: 0(2400,2000) 0(4400,300)

## Via types
v1: diameter 30, hole 20, Top Layer to Bottom Layer, 120 vias
v2: diameter 25, hole 15, Top Layer to Bottom Layer, 43 vias
v3: diameter 50, hole 28, Top Layer to Bottom Layer, 8 vias
v4: diameter 19.68, hole 7.87, Top Layer to Bottom Layer, 6 vias

## Nets (pads, with @x,y where several pads share a name; then routed paths per layer and width w, separated by ;. In a path a pad name is that pad's centre, name@x,y a point inside that pad or via, vN(x,y) a via of type N, cw(c..) or ccw(c..) an arc to the next point about the centre after c; other vN are vias at no path point)
5VCC: "Power & Reset1.5" C57.2 C58.1 C62.2 L2.2 R20.2 U8.6 U10.7 | length 4557.8
  Top Layer w8: U10.7@1192.44,1234.84 U10.7@1195,1232.28
  Top Layer w10: U8.6@339.84,692.4 339.84,704.84 v1(370,735)
  Top Layer w15: v1(1185,1350) 1185,1312.44 C62.2@1192.44,1305 U10.7@1192.44,1234.84
  Bottom Layer w10: v1(150,735) 180,765 340,765 v1(370,735)
  Bottom Layer w25: 220,900 120,900 60,840 60,220 140,140 657.93,140 687.93,110 856.52,110 916.52,50 3250,50 3300,100
ADC_RX_MCLK: U4.9 U5.112 | length 714.5
  Top Layer w8: U5.112@2784.13,761.61 2824.57,761.61 2875,812.05 3145,812.05 3155,802.05 v2(3185,802.05)
  Top Layer w10: v2(3205,902.05) 3256.46,953.5 U4.9@3364.02,953.5
  Bottom Layer w8: v2(3185,802.05) 3205,822.05 v2(3205,902.05)
ADC_RX_SCK: U4.8 U5.120 | length 629.8
  Top Layer w8: U5.120@2784.13,919.09 2847.95,919.09 2870,897.05 3110,897.05 3118.5,905.55 3118.5,917.17 3147.38,946.05 3159,946.05 3192.05,979.09 U4.8@3364.02,979.09
ADC_RX_SDA: U4.10 U5.116 | length 616.1
  Top Layer w8: U5.116@2784.13,840.35 2784.83,841.05 2844.4,841.05 2858.4,855.05 3193.4,855.05 3266.27,927.91 U4.10@3364.02,927.91
ADC_RX_WS: U4.11 U5.114 | length 621.9
  Top Layer w8: U5.114@2784.13,800.98 2824.14,800.98 2864.2,841.05 3199.2,841.05 3260.48,902.32 U4.11@3364.02,902.32
AVDD: C1.2 C2.2 C3.2 C4.2 C5.2 C6.2 C10.2 C11.2 C54.2 C55.1 FB5.1 L1.2 R3.2 R19.2 U1.3 U1.6 U2.3 U2.6 U3.3 U3.6 U4.26 U7.6 | length 1750.4
  Top Layer w10: U7.6@1124.84,692.4 1124.84,704.84 v1(1155,735) ; FB5.1@3143.62,1257.05 v1(3185,1257.05) ; U4.26@3635.83,1110.16 3677.6,1110.16 3725,1157.56 C10.2@3755,1157.56 ; v1(3735,330) 3765,360 3770,360 3779.41,369.41 U1.3@3808.58,369.41 ; C10.2@3745,1160 C11.2@3795,1160 3795.16,1160.16 v1(3840.16,1160.16) ; v1(3825,907.56) 3845,927.56 R3.2@3845,948.03 ; U1.6@3881.42,420.59 3889.69,428.86 C1.2@3889.69,470 v1(3925,470) ; v1(3935,330) 3960,355 C4.2@3960,360.31 3985.31,360.31 3994.41,369.41 U2.3@4008.58,369.41 ; U2.6@4081.42,420.59 4081.42,431.42 4089.69,439.69 C3.2@4089.69,470 v1(4120,470) ; v1(4135,330) 4160,355 C6.2@4160,360.31 4185.31,360.31 4194.41,369.41 U3.3@4208.58,369.41 ; U3.6@4281.42,420.59 4281.42,441.42 4289.69,449.69 C5.2@4289.69,470 v1(4325,470)
  Top Layer w25: C55.1@890,788.07 890,825 960,895 v3(990,895)
  Bottom Layer w10: v1(935,735) 965,765 1125,765 v1(1155,735) ; v1(3185,1257.05) v1@3610,1257.05
  other v1: 3610.16,1260.16
DAC_TX_MLCK: U4.5 U5.118 | length 705.6
  Top Layer w8: U5.118@2784.13,879.72 2847.73,879.72 2858.4,869.05 3122,869.05 v2(3155,902.05) ; v2(3155,977.05) 3233.82,1055.87 U4.5@3364.02,1055.87
  Bottom Layer w8: v2(3155,902.05) v2(3155,977.05)
DAC_TX_SCK: U4.4 U5.14 | length 1294.2
  Top Layer w8: v2(2443.58,1407.05) U5.14@2443.58,1476.18 ; v2(3207.5,1064.55) 3224.41,1081.46 U4.4@3364.02,1081.46
  Bottom Layer w8: v2(2443.58,1407.05) 2560,1407.05 2665,1302.05 2665,1082.05 2715,1032.05 3175,1032.05 v2(3207.5,1064.55)
DAC_TX_SDA: U4.6 U5.119 | length 660.5
  Top Layer w8: U5.119@2784.13,899.41 2847.84,899.41 2864.2,883.05 3116.2,883.05 3132.5,899.35 3132.5,911.37 3153.18,932.05 v2(3180,932.05) ; v2(3268.23,1030.28) U4.6@3364.02,1030.28
  Bottom Layer w8: v2(3180,932.05) 3240,992.05 3240,1002.05 v2(3268.23,1030.28)
DAC_TX_WS: U4.7 U5.113 | length 742.7
  Top Layer w8: U5.113@2784.13,781.3 2824.25,781.3 2870,827.05 3225.2,827.05 3265.2,867.05 v2(3275,867.05) ; v2(3292.64,1004.68) U4.7@3364.02,1004.68
  Bottom Layer w8: v2(3275,867.05) 3275,987.05 v2(3292.64,1004.68)
DVDD: "ISP PGM2.3" "Power & Reset1.2" "Power & Reset1.4" C8.2 C9.2 C27.2 C28.2 C32.1 C37.2 C38.2 C39.2 C40.2 C41.2 C42.2 C43.2 C44.2 C45.2 C46.2 C47.2 C48.2 C49.2 C50.2 C60.2 C61.1 C71.2 DBGEN1.1 FB1.1 FB2.1 JTAG/DEBUG1.1@2180,1960 L3.2 R1.2 R2.2 R6.1 R7.1 R9.2 R12.2 R17.2 R18.2 R21.2 R22.1 R23.1 R40.1 R41.1 R42.1 R43.1 R44.1 R45.1 SD1.4 TRST1.1 U4.13 U5.5 U5.25 U5.36 U5.41 U5.59 U5.71 U5.77 U5.94 U5.107 U5.111 U5.127 U5.131 U5.141 U9.6 | length 3497.7
  Top Layer w10: TRST1.1@170,1950 130,1910 130,1875 v1(220,1875) ; U9.6@734.84,692.4 734.84,704.84 v1(765,735) ; R44.1@814.53,1060 v1(855,1060) ; R45.1@814.53,1110 825,1110 v1(855,1140) ; R43.1@814.53,1160 814.53,1199.53 v1(815,1200) ; R42.1@814.53,1435 814.53,1395.47 v1(815,1395) ; R40.1@814.53,1485 840,1485 v1(865,1510) ; R41.1@814.53,1535 815,1535.47 v1(815,1575) ; v1(930,2655) C28.2@967.44,2617.56 ; R9.2@1639.53,115 v1(1680,115) ; v1@1786.42,958.46 U5.59@1925.87,958.46 ; v1(1790.2,722.24) U5.71@1925.87,722.24 ; U5.36@2008.15,1476.18 2008.15,1558.58 C44.2@2004.69,1562.05 v1(2045,1562.05) ; C40.2@2089.25,491.73 U5.77@2089.25,612.91 ; C40.2@2090,491.73 v1@2129.69,491.73 ; JTAG/DEBUG1.1@2180,1960 2180.31,1959.69 C50.2@2280,1959.69 v1(2280,2005) ; R18.2@2189.53,1825 2189.53,1820.47 v1(2220,1790) ; C46.2@2230,1537.36 2230.32,1537.05 v2(2260,1537.05) ; U5.94@2423.9,612.91 2423.9,570.63 C39.2@2400,546.73 2434.69,546.73 v1(2435,547.05) ; U5.5@2620.75,1476.18 2620.75,1511.3 2615,1517.05 2615,1567.05 2624.69,1576.73 C45.2@2640,1576.73 2640.31,1577.05 v1(2675,1577.05) ; C38.2@2679.8,546.93 U5.107@2679.8,617.91 ; C38.2@2680.31,547.05 v1(2715,547.05) ; U5.111@2784.13,741.93 2839.88,741.93 2880,782.05 C37.2@2890.31,782.05 ; U5.127@2784.13,1056.89 2834.84,1056.89 2845.31,1067.36 C49.2@2865,1067.36 2899.69,1067.36 v1(2900,1067.05) ; U5.141@2784.13,1332.48 C47.2@2914.88,1332.48 ; v2(2890,747.05) C37.2@2890,781.73 ; v1(2915,1297.05) C47.2@2915,1332.36 ; U4.13@3364.17,854.25 3411.06,854.25 3429.16,836.16 3429.16,774.47 C8.2@3400,745.31 C9.2@3400,695.31 3400,695 v1(3365.16,660.16) ; v1@3500.63,700.63 R1.2@3500.63,745.16 ; v1@3659.69,700.63 R2.2@3659.69,745.16
  Top Layer w15: SD1.4@554.72,1316.65 653.35,1316.65 675,1295 C71.2@788.07,1295 ; v1(1100,945) R23.1@1135.47,945 ; R22.1@1309.53,945 v1(1345,945) ; v1(3410,1300) R6.1@3449.53,1300 ; R7.1@3505,1299.53 v1(3505,1335)
  Top Layer w25: C61.1@500,788.07 500,820 575,895 v3(620,895)
  Bottom Layer w10: v1(545,735) 575,765 735,765 v1(765,735) ; FB1.1@2400,1278.43 2421.38,1257.05 v1(2445,1257.05) ; FB2.1@2525,1278.43 2546.38,1257.05 v1(2570,1257.05)
  other v1: 2130,492.05 3500.16,700.16 3660.16,700.16 1785,958.46 1494.68,1275